# Allegro board 2019-09-10-2.brd
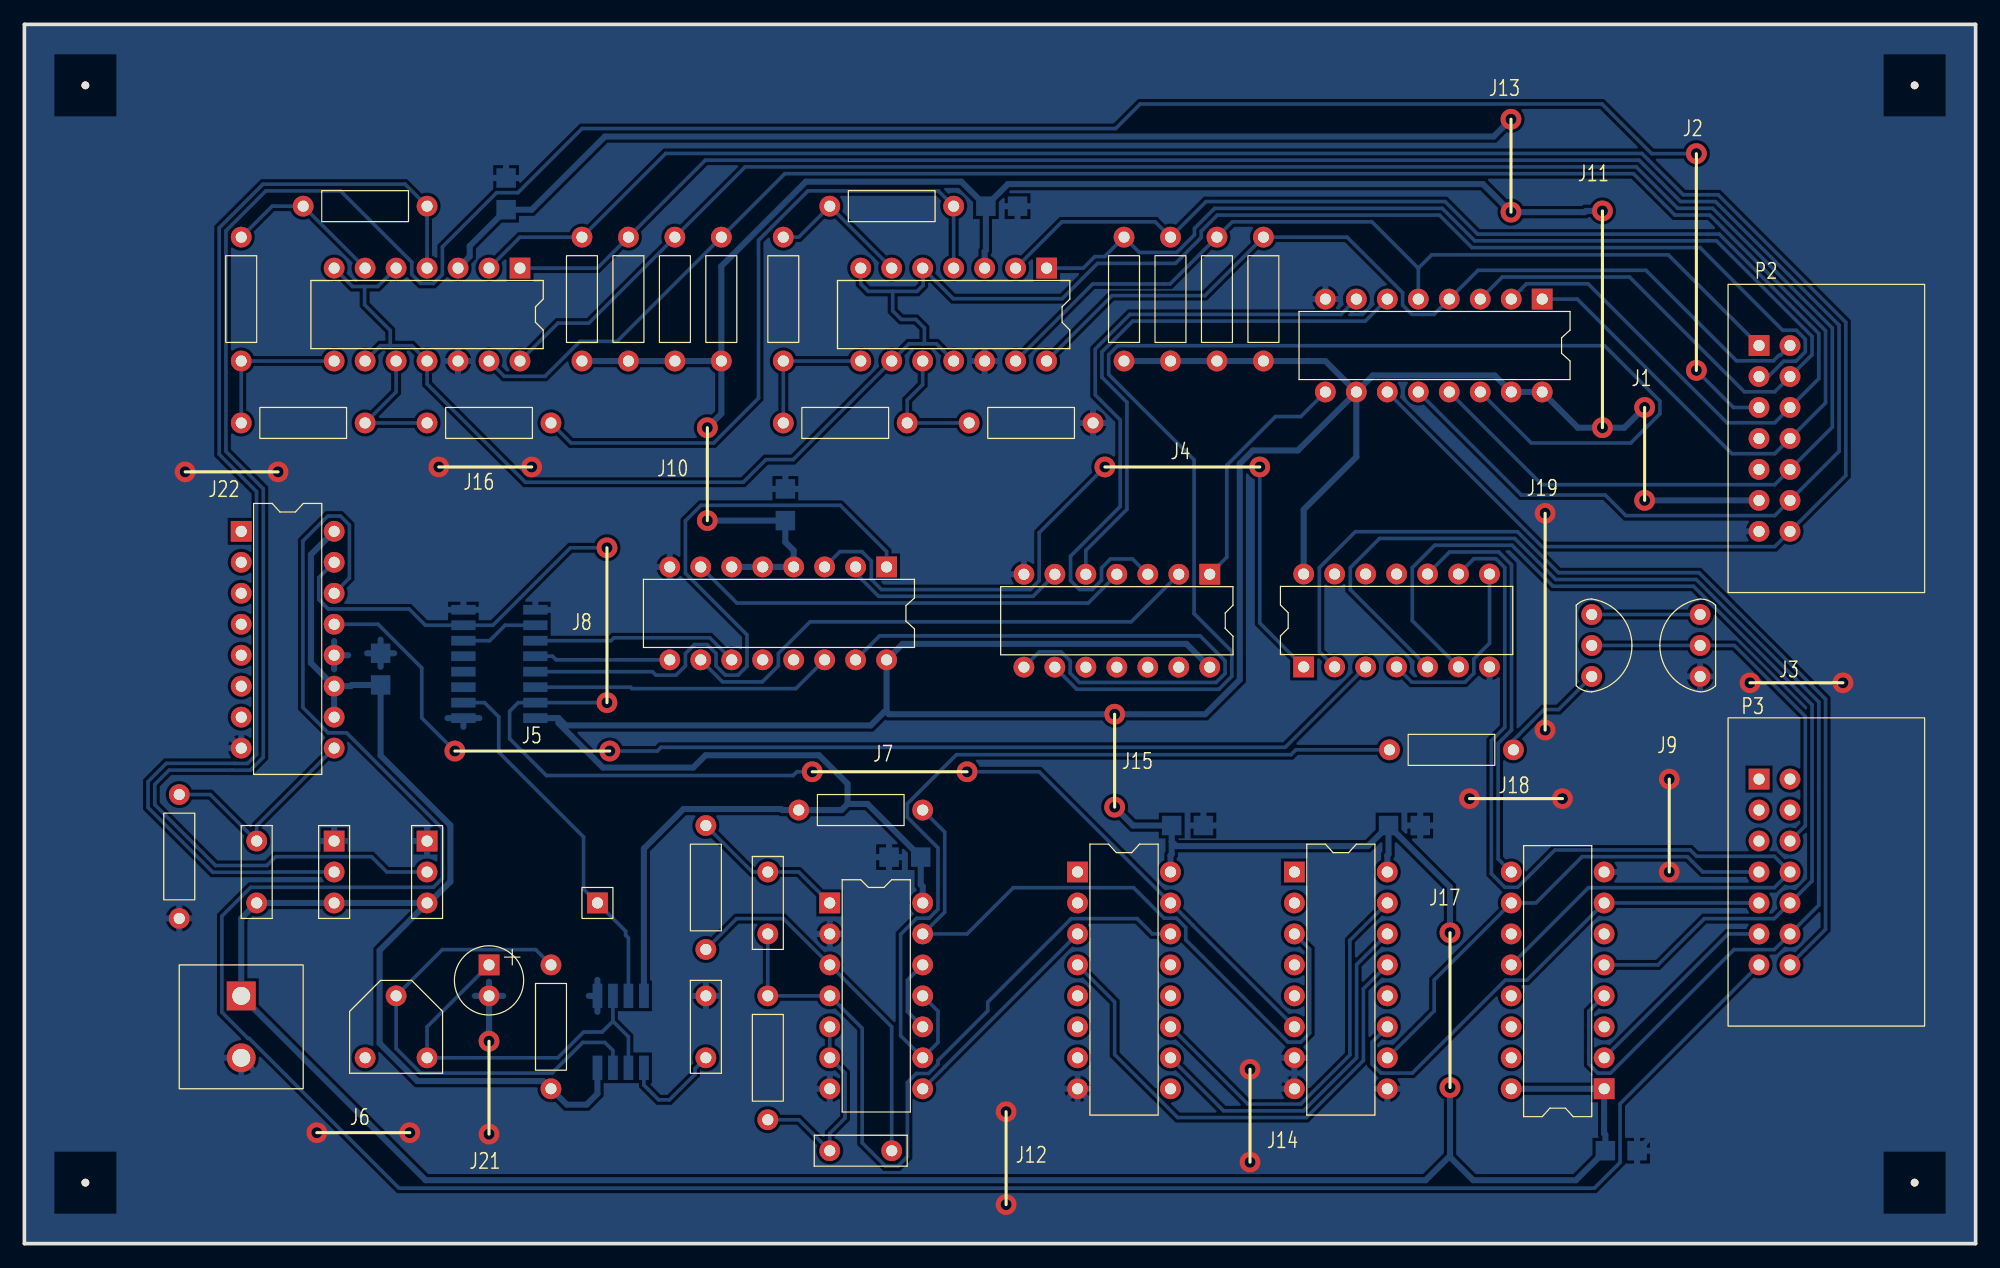
[diagram p0: board, top side]
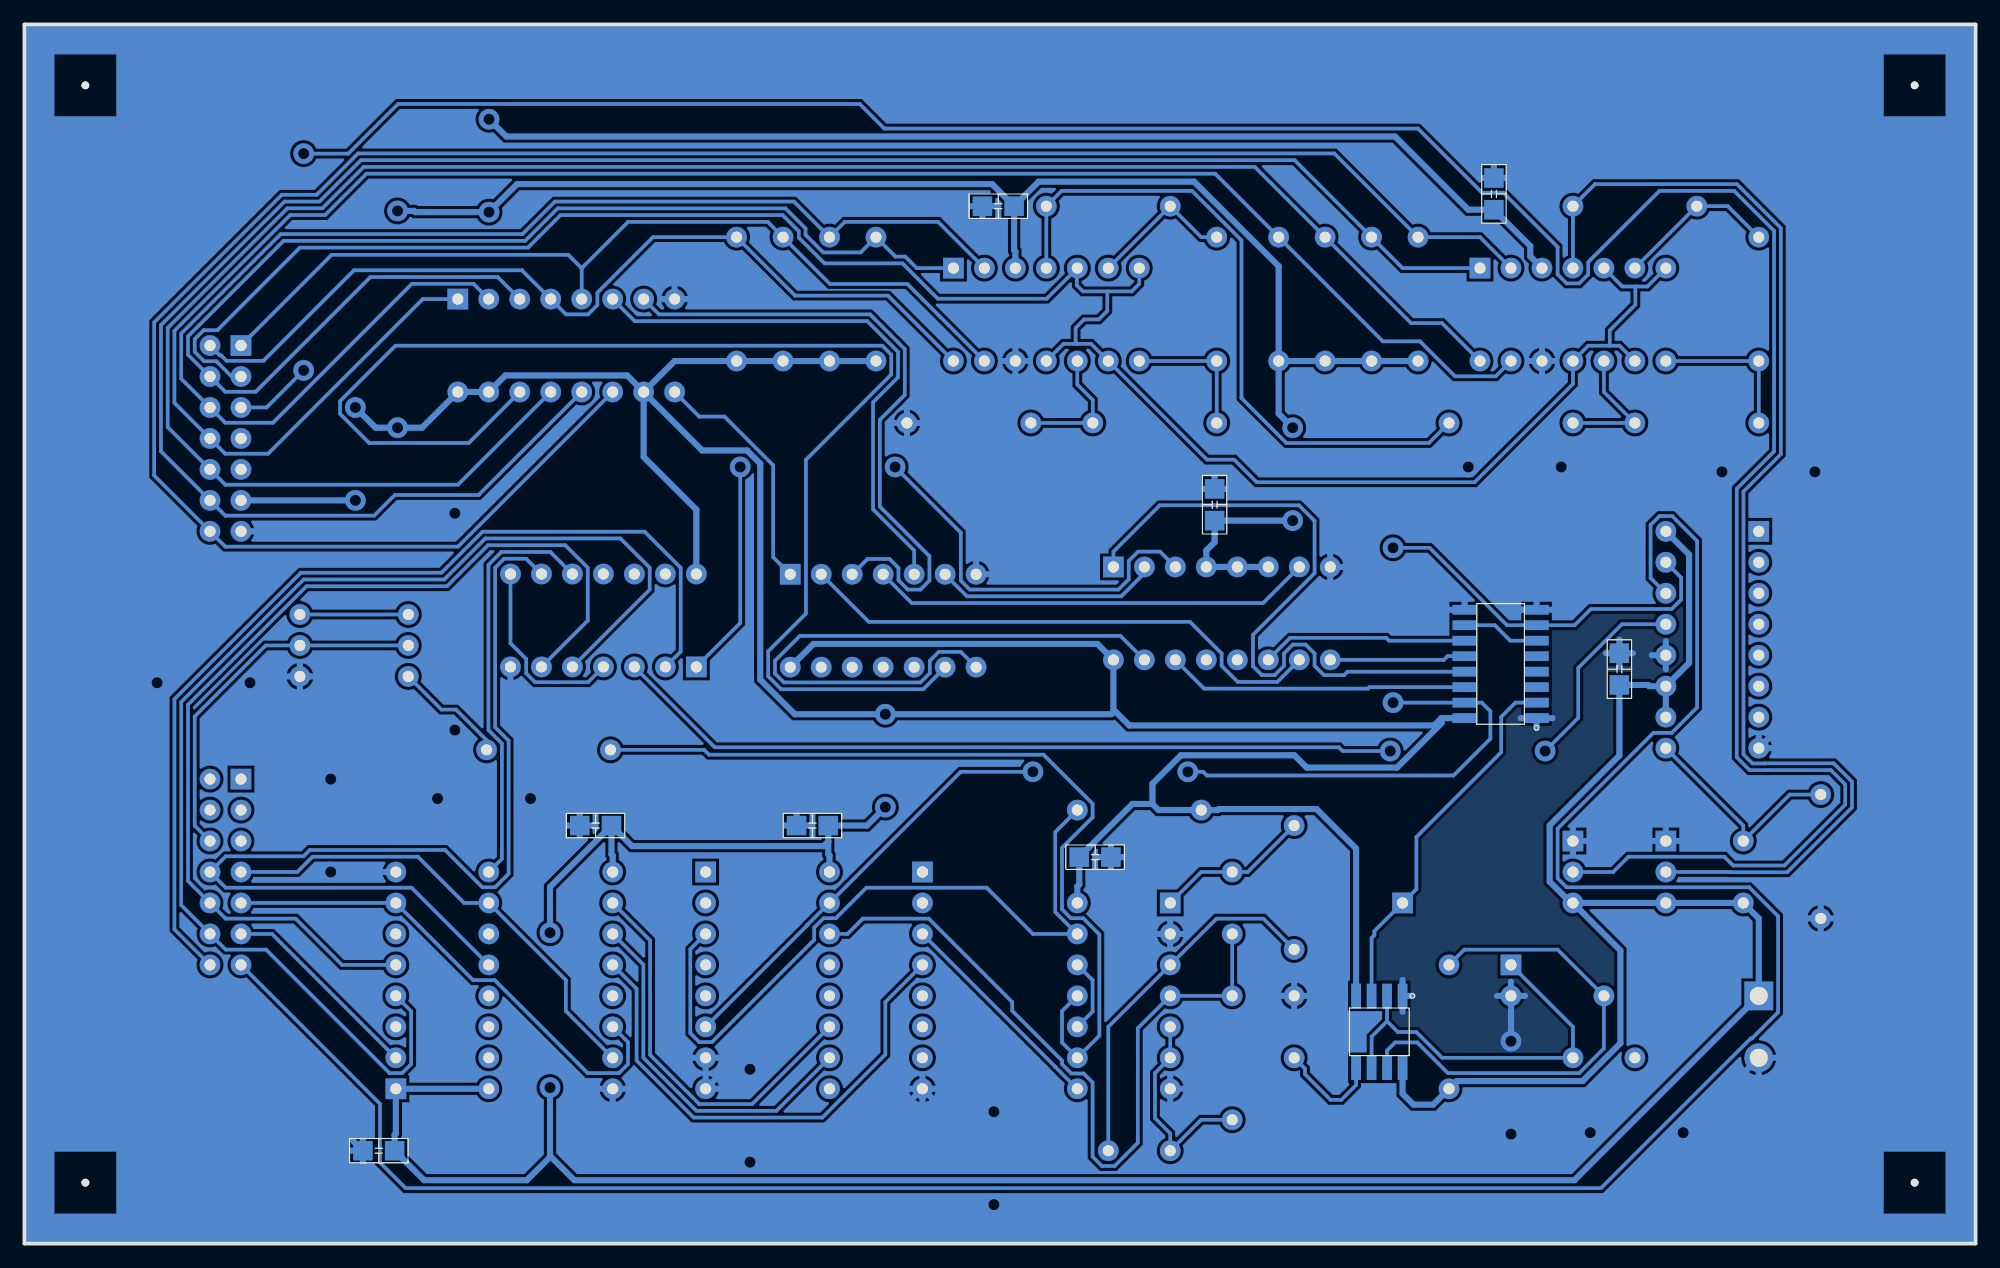
[diagram p1: board, bottom side, seen from below]

Outline 160 x 100 mm; copper layers: TOP, BOTTOM. Coordinates in mm from the lower left corner of the outline.
Outline path: 0,100 0,0 160,0 160,100 0,100

## Design rules (mm)
nets with their own width: min track width 0.5; nets +5V GND

## Placement (name value [footprint] x y rotation side)
C1  10uF  [CAP196]  38.1 22.86 0 top
C2  0.1uF  [CAP300]  55.88 15.24 90 top
C3  0.1uF  [CAP300]  19.05 27.94 90 top
C4  0.01uF  [CAP300]  60.96 30.48 270 top
C5  0.01uF  [CAP300]  71.12 7.62 180 top
C6  0.1uF  [SMDCAP]  39.5 84.7 90 bottom
C7  0.1uF  [SMDCAP]  78.74 85.09 0 bottom
C8  0.1uF  [SMDCAP]  62.4 59.2 90 bottom
C9  0.1uF  [SMDCAP]  111.76 34.29 0 bottom
C10  0.1uF  [SMDCAP]  93.98 34.29 0 bottom
C11  0.1uF  [SMDCAP]  29.21 45.72 90 bottom
C12  0.1uF  [SMDCAP]  129.54 7.62 0 bottom
C13  0.1uF  [SMDCAP]  73.6 31.7 180 bottom
J1  -  [JUMPER2]  132.86 60.96 270 bottom
J2  -  [JUMPER6]  137.1 89.4 90 bottom
J3  -  [JUMPER2]  141.5 46 180 bottom
J4  -  [JUMPER4]  88.6 63.7 180 bottom
J5  -  [JUMPER4]  48 40.4 0 bottom
J6  -  [JUMPER2]  31.6 9.1 0 bottom
J7  -  [JUMPER4]  77.3 38.7 0 bottom
J8  -  [JUMPER4]  47.77 44.37 270 bottom
J9  -  [JUMPER2]  134.88 30.48 270 bottom
J10  -  [JUMPER2]  56 59.3 270 bottom
J11  -  [JUMPER6]  129.4 84.7 90 bottom
J12  -  [JUMPER2]  80.5 3.2 270 bottom
J13  -  [JUMPER2]  121.9 84.6 270 bottom
J14  -  [JUMPER2]  100.5 14.3 90 bottom
J15  -  [JUMPER2]  89.4 35.8 270 bottom
J16  -  [JUMPER2]  41.6 63.7 0 bottom
J17  -  [JUMPER4]  116.9 25.5 90 bottom
J18  -  [JUMPER2]  118.5 36.5 180 bottom
J19  -  [JUMPER6]  124.7 59.9 90 bottom
J21  -  [JUMPER2]  38.1 16.6 90 bottom
J22  -  [JUMPER2]  20.8 63.3 0 bottom
NOREF  -  [unnamed]  5 5 0 top
NOREF#2  -  [#2]  0 0 90 top
NOREF#3  -  [unnamed]  5 95 0 top
NOREF#4  -  [#2]  0 0 0 top
NOREF#5  -  [unnamed]  155 95 0 top
NOREF#6  -  [unnamed]  155 5 0 top
P1  CON2  [POWER2]  17.78 20.32 270 top
P2  CON14  [JUMPER14]  142.24 73.66 270 top
P3  CON14  [JUMPER14]  142.24 38.1 270 top
Q1  2SC1815  [TO92]  128.52 51.6 270 top
Q2  2SC1815  [TO92]  137.41 46.52 90 top
R1  10K  [RES400]  43.18 12.7 0 top
R2  10K  [RES400]  33.02 85.09 90 top
R3  10K  [RES400]  17.78 82.55 180 top
R4  10K  [RES400]  17.78 67.31 270 top
R5  10K  [RES400]  33.02 67.31 270 top
R6  10K  [RES400]  76.2 85.09 90 top
R7  10K  [RES400]  62.23 82.55 180 top
R8  10K  [RES400]  62.23 67.31 270 top
R9  100  [RES400]  77.47 67.31 270 top
R10  4.7K  [RES400]  45.72 72.39 0 top
R11  4.7K  [RES400]  49.53 72.39 0 top
R12  4.7K  [RES400]  53.34 72.39 0 top
R13  4.7K  [RES400]  57.15 72.39 0 top
R14  4.7K  [RES400]  93.98 72.39 0 top
R15  4.7K  [RES400]  90.17 72.39 0 top
R16  4.7K  [RES400]  101.6 72.39 0 top
R17  4.7K  [RES400]  97.79 72.39 0 top
R18  680K  [RES400]  12.7 36.83 180 top
R19  10K  [RES400]  55.88 34.29 180 top
R20  10K  [RES400]  60.96 20.32 180 top
R21  10K  [RES400]  63.5 35.56 270 top
R22  1K  [RES400]  122.1 40.5 90 top
TP1  TP  [JUMPER1]  46.99 27.94 0 top
U1  NE555  [SOP8]  46.99 20.32 270 bottom
U2  LM339  [DIP14_3]  40.64 80.01 270 top
U3  LM339  [DIP14_3]  83.82 80.01 270 top
U4  40147  [DIP16_3]  124.46 77.47 270 top
U5  4069  [DIP14_3]  97.2 54.9 270 top
U6  4518  [SOP16]  36 43.1 0 bottom
U7  4585  [DIP16_3]  70.7 55.5 270 top
U8  4027  [DIP16_3]  17.78 58.42 0 top
U9  4071  [DIP14_3]  104.9 47.3 90 top
U10  4001  [DIP14_3]  66.04 27.94 0 top
U11  4017  [DIP16_3]  86.36 30.48 0 top
U12  4051  [DIP16_3]  104.14 30.48 0 top
U13  4175  [DIP16_3]  129.54 12.7 180 top
VR1  1M  [RESADJ]  33.02 15.24 270 top
VR2  10K  [JUMPER3]  25.4 33.02 270 top
VR3  10K  [JUMPER3]  33.02 33.02 270 top

## Library data of the parts
C1 = Cap Pol
C2-C5 = Cap NP: Tolerance: ***; User Part Number: ***
C6-C13 = Cap TEXT
J1-J19 J21 J22 = JUMPER
P1 = CON2
P2 P3 = CON14: User Part Number: ***
Q1 Q2 = 2SC1815
R1-R22 = resistor: Tolerance: ***; User Part Number: ***
TP1 = TP: User Part Number: ***
U1 = NE555
U2 U3 = LM339: Tolerance: ***; User Part Number: ***
U4 = 40147: Tolerance: ***; User Part Number: ***
U5 = 4069: Tolerance: ***; User Part Number: ***
U6 = 4518
U7 = 4585: Tolerance: ***; User Part Number: ***
U8 = 4027: Tolerance: ***; User Part Number: ***
U9 = 4071: Tolerance: ***; User Part Number: ***
U10 = 4001: Tolerance: ***; User Part Number: ***
U11 = 4017: Tolerance: ***; User Part Number: ***
U12 = 4051: Tolerance: ***; User Part Number: ***
U13 = 4175: Tolerance: ***; User Part Number: ***
VR1 = VR1: Tolerance: ***; User Part Number: ***
VR2 VR3 = VR2: User Part Number: ***

## Footprints (pads in the part's own frame, mm; a bottom-side part is the same pattern mirrored in y, then rotated)
CAP196
  rect 1.7x1.7 hole 0.914: 1(0,0)
  round 1.7 hole 0.91: 2(0,-2.54)
CAP300
  round 1.7 hole 0.91: 1(0,0) 2(5.08,0)
DIP14_3
  rect 1.7x1.7 hole 0.914: 1(0,0)
  round 1.7 hole 0.91: 2(0,-2.54) 3(0,-5.08) 4(0,-7.62) 5(0,-10.16) 6(0,-12.7) 7(0,-15.24) 8(7.62,-15.24) 9(7.62,-12.7) 10(7.62,-10.16) 11(7.62,-7.62) 12(7.62,-5.08) 13(7.62,-2.54) 14(7.62,0)
DIP16_3
  rect 1.7x1.7 hole 0.914: 1(0,0)
  round 1.7 hole 0.91: 2(0,-2.54) 3(0,-5.08) 4(0,-7.62) 5(0,-10.16) 6(0,-12.7) 7(0,-15.24) 8(0,-17.78) 9(7.62,-17.78) 10(7.62,-15.24) 11(7.62,-12.7) 12(7.62,-10.16) 13(7.62,-7.62) 14(7.62,-5.08) 15(7.62,-2.54) 16(7.62,0)
JUMPER1
  rect 1.7x1.7 hole 0.914: 1(0,0)
JUMPER3
  rect 1.7x1.7 hole 0.914: 1(0,0)
  round 1.7 hole 0.91: 2(2.54,0) 3(5.08,0)
JUMPER14
  rect 1.7x1.7 hole 0.914: 1(0,0)
  round 1.7 hole 0.91: 2(0,2.54) 3(2.54,0) 4(2.54,2.54) 5(5.08,0) 6(5.08,2.54) 7(7.62,0) 8(7.62,2.54) 9(10.16,0) 10(10.16,2.54) 11(12.7,0) 12(12.7,2.54) 13(15.24,0) 14(15.24,2.54)
POWER2
  rect 2.362x2.362 hole 1.473: 1(0,0)
  round 2.362 hole 1.473: 2(5.08,0)
RES400
  round 1.7 hole 0.91: 1(0,0) 2(0,10.16)
RESADJ
  round 1.7 hole 0.91: 1(0,0) 2(-5.08,-2.54) 3(0,-5.08)
SMDCAP
  rect 1.6x1.6 smd: 1(0.1,0) 2(2.7,0)
SOP8
  rect 2x0.8 smd: 1(0,0) 2(0,-1.27) 3(0,-2.54) 4(0,-3.81) 5(5.9,-3.81) 6(5.9,-2.54) 7(5.9,-1.27) 8(5.9,0)
SOP16
  rect 2x0.8 smd: 1(0,0) 2(0,-1.27) 3(0,-2.54) 4(0,-3.81) 5(0,-5.08) 6(0,-6.35) 7(0,-7.62) 8(0,-8.89) 9(5.9,-8.89) 10(5.9,-7.62) 11(5.9,-6.35) 12(5.9,-5.08) 13(5.9,-3.81) 14(5.9,-2.54) 15(5.9,-1.27) 16(5.9,0)
TO92
  round 1.7 hole 0.91: 1(0,0) 2(2.54,0) 3(5.08,0)
unnamed
  round 0.635 hole 3.175 unplated: (0,0)

## Nets
+5V: C3.1 C6.1 C7.1 C8.1 C9.1 C10.1 C11.1 C12.1 C13.1 P1.1 P2.11 R1.1 R10.1 R11.1 R12.1 R13.1 R14.1 R15.1 R16.1 R17.1 R21.1 U1.4(RST) U1.8(VCC) U2.3 U3.3 U4.10(I\9\) U4.15(I\0\) U4.16(VCC) U5.14 U6.16 U7.4(A>BIN) U7.5(A<BIN) U7.6(A=BIN) U7.16(VCC) U8.10(J) U8.11(K) U8.16 U9.14 U10.14 U11.16(VCC) U12.16(VCC) U13.1(R\S\T\) U13.16(VCC) VR2.3(A) VR3.3(A)
GND: C1.2 C2.2 C6.2 C7.2 C8.2 C9.2 C10.2 C11.2 C12.2 C13.2 P1.2 P2.13 Q2.1(B) R9.2 R18.2 U1.1(GND) U2.12 U3.12 U4.8(GND) U5.7 U6.1(CLK) U6.8 U6.9(CLK) U7.8(GND) U8.8 U8.12(RST) U9.7 U10.2(I1) U10.7 U11.8(GND) U12.7(VEE) U12.8(GND) U12.9(C) U13.8(GND) VR2.1(WIPER) VR3.1(WIPER)
AD0: P2.14 R10.2 U2.2(OUT) U4.11(I\1\)
AD1: P2.12 R11.2 U2.1(OUT) U4.12(I\2\)
AD2: P2.10 R12.2 U2.14(OUT) U4.13(I\3\)
AD3: P2.8 R13.2 U2.13(OUT) U4.1(I\4\)
AD4: P2.6 R14.2 U3.2(OUT) U4.2(I\5\)
AD5: P2.4 R15.2 U3.1(OUT) U4.3(I\6\)
AD6: P2.2 R16.2 U3.14(OUT) U4.4(I\7\)
AD7: P2.1 R17.2 U3.13(OUT) U4.5(I\8\)
CLK: TP1.1 U1.3(OUT) U6.2(EN)
MOTOR-GND: P3.6 Q1.2(C) Q2.2(C)
MR: U6.7(CLR) U6.15(CLR) U8.15(Q) U11.15(RST) U12.6(E\N\)
MR2: P3.13 U8.14(Q\)
SW1: P3.14 U9.2(I1)
SW2: P3.12 U9.5(I0) U13.4(D0)
SW3: P3.10 U9.6(I1) U13.5(D1)
SW4: P3.8 U9.9(I1) U13.12(D2)
SWLED1: P3.11 U13.2(Q0)
SWLED2: P3.9 U12.11(A) U13.7(Q1)
SWLED3: P3.7 U12.10(B) U13.10(Q2)
VR3: P2.5 VR3.2(B)
VR-LED: P2.3 U2.5(+IN) U2.7(+IN) U2.9(+IN) U2.11(+IN) U3.5(+IN) U3.7(+IN) U3.9(+IN) U3.11(+IN)
N01960: R2.2 R3.1 U2.6(-IN)
N01964: R2.1 U2.4(-IN) VR2.2(B)
N02001: R3.2 R4.1 U2.8(-IN)
N02088: R4.2 R5.1 U2.10(-IN)
N02162: R5.2 R6.1 U3.4(-IN)
N02236: R6.2 R7.1 U3.6(-IN)
N02310: R7.2 R8.1 U3.8(-IN)
N02384: R8.2 R9.1 U3.10(-IN)
N03342: U4.9(A\) U5.1(I)
N03346: U4.7(B\) U5.3(I)
N03353: U4.6(C\) U5.5(I)
N03365: U4.14(D\) U5.9(I)
N03377: U5.8(O) U7.15(A3)
N03391: U5.6(O) U7.2(A2)
N03403: U5.4(O) U7.7(A1)
N03415: U5.2(O) U7.10(A0)
N03439: U6.11(Q0) U7.11(B0)
N03441: U6.12(Q1) U7.9(B1)
N03443: U6.13(Q2) U7.1(B2)
N03445: U6.14(Q3) U7.14(B3)
N03459: U6.6(Q3) U6.10(EN)
N03623: R1.2 U1.7(DISC) VR1.2
N03677: C1.1 U1.2(TRIG) U1.6(THR) VR1.1
N03742: C2.1 U1.5(CV)
N03797: U7.3(A=BOUT) U9.1(I0)
N03822: U8.13(CLK) U9.3(O)
N03853: C3.2 R18.1 U8.9(SET)
N08438: C4.1 R19.1 U10.1(I0)
N08457: C4.2 R20.1 U10.4(O) U11.14(CLK)
N08473: C5.2 R20.2 U10.5(I0) U10.6(I1)
N08528: C5.1 R19.2 U10.3(O)
N08724: U11.11(9) U12.15(X2)
N08757: U11.10(4) U12.14(X1)
N08772: U11.4(2) U12.13(X0)
N08784: U10.8(I0) U11.3(0)
N08808: R21.2 U10.13(I1) U12.3(X)
N08837: U9.4(O) U9.8(I0)
N08841: U9.10(O) U13.9(CLK)
N09092: U10.10(O) U10.12(I0)
N09117: R22.2 U10.9(I1) U10.11(O)
N09203: Q1.3(E) R22.1
N09219: Q1.1(B) Q2.3(E)

Pads without a net: P2 7 9; P3 1 2 3 4 5; U5 10 11 12 13; U6 3 4 5; U7 12 13; U8 1 2 3 4 5 6 7; U9 11 12 13; U11 1 2 5 6 7 9 12 13; U12 1 2 4 5 12; U13 3 6 11 13 14 15; VR1 3

## Via types
v1: diameter 1.7, hole 0.91, TOP to BOTTOM, 42 vias

## Routing (per net, layer and track width the routed paths; a pad name or vN(x,y) marks a point on that pad's centre or on a via; arc(x,y) is an arc through that point)
+5V: length 761.7
  BOTTOM w0.5: R13.1 57.15,68.07 v1(56,66.92) ; R13.1 57.15,80.17 64.08,87.1 76.83,87.1 C7.1 ; R13.1 R12.1 R11.1 R10.1 ; VR3.3 29.13,24.05 29.13,16.43 32.23,13.33 42.55,13.33 R1.1 44.48,11.4 46.1,11.4 46.99,12.29 U1.8 ; VR3.3 VR2.3 C3.1 17.78,26.67 P1.1 32.9,5.2 114.9,5.2 116.9,7.2 ; VR3.3 33.18,27.94 34.93,29.69 34.93,34.31 29.21,40.03 C11.1 26.85,45.82 26.75,45.72 U8.11 ; 116.9,7.2 116.9,7.1 118.8,5.2 127.22,5.2 C12.1 129.64,8.92 129.54,9.02 U13.1 U13.16 ; 116.9,7.2 v1(116.9,12.8) ; 70.7,43.6 70.88,43.42 v1(89.4,43.42) 96.82,43.42 99.66,46.26 99.66,63.98 100.74,65.05 104.42,65.05 U4.10 ; 70.7,43.6 70.5,43.6 69.4,42.5 44.4,42.5 43.8,43.1 ; 70.7,43.6 U7.16 72.01,49.19 95.29,49.19 U5.14 ; U4.10 109.22,64.52 104.9,60.2 U9.14 ; U4.10 106.68,72.39 R16.1 R17.1 R14.1 R15.1 ; U4.10 110.57,71.2 120.57,71.2 U4.15 U4.16 127.39,66.92 v1(129.4,66.92) 131.2,66.92 v1(132.86,68.58) ; U2.3 36.52,80.97 36.52,81.82 C6.1 41.6,84.8 47.6,90.8 120.48,90.8 v1(121.9,92.22) ; 94.08,32.99 94.47,32.6 110.17,32.6 C9.1 ; 94.08,32.99 94.08,31.93 93.98,31.83 U11.16 ; 94.08,32.99 C10.1 90.91,34.29 v1(89.4,35.8) ; U8.11 U8.10 ; U8.11 23.49,47.63 23.49,56.51 U8.16 ; v1(116.9,25.5) 116.9,29.25 C9.1 ; 43.8,43.1 43.8,42.69 47.44,39.05 54.85,39.05 55.85,40.05 65.16,40.05 67.5,37.72 67.5,36.06 ; 43.8,43.1 U6.16 ; 67.5,36.06 69.14,36.06 C13.1 73.5,29.45 73.66,29.29 U10.14 ; 67.5,36.06 67,35.56 R21.1 62.15,35.56 62.06,35.64 54.04,35.64 50.8,32.4 U1.4 ; C7.1 78.84,81.46 78.74,81.36 U3.3 ; C7.1 80.65,86.9 119.6,86.9 v1(121.9,84.6) 127.95,84.6 128.05,84.7 v1(129.4,84.7) ; C9.1 111.86,31.93 111.76,31.83 U12.16 ; v1(56,59.3) C8.1 62.4,57.53 63.08,56.85 U7.4 U7.5 U7.6 ; P2.11 v1(132.86,60.96)
GND: length 378.6
  BOTTOM w0.5: 28.1,48.42 C11.2 ; C11.2 29.21,49.53 ; C11.2 30.32,48.42 ; C11.2 29.21,47.31 ; C8.2 63.51,61.9 ; C8.2 61.29,61.9 ; C8.2 62.4,63.01 ; Q2.1 137.41,47.68 ; Q2.1 136.25,46.52 ; Q2.1 138.76,46.52 139.28,46 v1(141.5,46) ; Q2.1 137.41,40.63 v1(134.88,38.1) 133.53,38.1 133.33,37.9 130.8,37.9 129.4,36.5 v1(126.12,36.5) 126.12,40.7 v1(124.7,42.12) ; 86.47,67.31 R9.2 ; R9.2 88.79,67.31 ; R9.2 87.63,66.15 ; R9.2 87.63,68.47 ; 102.98,15.24 U12.7 ; U12.7 104.14,14.08 ; U12.7 105.3,15.24 ; v1(20.8,63.3) 26.3,63.3 32.1,57.5 32.1,53.3 33.41,51.99 U6.8 ; P1.2 18.97,14.05 19.03,14.05 v1(23.98,9.1) 29.88,3.2 v1(80.5,3.2) ; P1.2 16.29,15.24 ; P1.2 17.78,13.75 ; 41.9,52.7 U6.9 43.21,51.99 ; v1(100.5,6.68) 92.38,6.68 U11.8 ; U12.9 112.92,12.7 ; U12.9 111.76,11.54 ; U12.9 110.6,12.7 ; 46.28,20.32 U1.1 ; U1.1 46.99,21.63 ; U1.1 46.99,19.01 ; C1.2 39.26,20.32 ; C1.2 38.1,21.48 ; C1.2 v1(38.1,16.6) ; C1.2 36.94,20.32 ; C12.2 133.35,7.62 ; C12.2 149.12,24.5 v1(149.12,46) ; C12.2 132.24,6.51 ; C12.2 132.24,8.73 ; C2.2 57.04,20.32 ; C2.2 55.88,19.16 ; C2.2 54.72,20.32 ; C2.2 55.88,21.48 ; v1(134.88,30.48) U13.8 ; 12.7,25.51 R18.2 ; R18.2 11.54,26.67 ; R18.2 12.7,27.83 ; R18.2 13.86,26.67 ; VR3.1 33.02,34.18 ; VR3.1 31.86,33.02 ; VR3.1 33.02,31.86 ; P2.13 126.18,58.42 v1(124.7,59.9) ; 77.58,72.39 U3.12 ; U3.12 79.9,72.39 ; U3.12 78.74,73.55 ; U3.12 78.74,71.23 ; 66.04,11.54 U10.7 ; U10.7 64.88,12.7 ; U10.7 66.04,13.86 ; 36,42.39 U6.1 ; U6.1 34.69,43.1 ; U6.1 37.31,43.1 ; U9.7 120.14,44.54 118.5,42.9 v1(118.5,36.5) ; U2.12 36.72,72.39 ; U2.12 35.56,73.55 ; U2.12 34.4,72.39 ; U2.12 35.56,71.23 ; U10.2 66.04,26.56 ; U10.2 66.04,24.24 ; U10.2 67.2,25.4 ; U10.2 64.88,25.4 ; 85.2,12.7 U11.8 ; U11.8 86.36,13.86 ; U11.8 84.48,10.82 v1(80.5,10.82) ; U11.8 87.52,12.7 ; U11.8 86.36,11.54 ; 113.35,34.29 C9.2 ; C9.2 115.57,34.29 ; C9.2 114.46,35.4 ; C9.2 114.46,33.18 ; 52.92,54.34 U7.8 ; U7.8 51.76,55.5 ; U7.8 52.92,56.66 ; U8.12 25.4,49.42 ; U8.12 26.56,48.26 ; U8.12 25.4,47.1 ; 81.44,83.98 C7.2 ; C7.2 80.33,85.09 ; C7.2 82.55,85.09 ; C13.2 70.9,32.81 ; C13.2 69.79,31.7 ; C13.2 72.01,31.7 ; C13.2 70.9,30.59 ; C6.2 40.61,87.4 ; C6.2 38.39,87.4 ; C6.2 39.5,88.51 ; 102.98,12.7 U12.8 ; U12.8 102.54,14.3 v1(100.5,14.3) ; U12.8 104.14,13.86 ; U6.8 36,52.7 ; U6.8 37.31,51.99 ; 81.96,56.06 U5.7 80.8,54.9 ; v1(31.6,9.1) 32.95,9.1 33.07,8.98 v1(38.1,8.98) ; VR2.1 26.56,33.02 ; VR2.1 24.24,33.02 ; VR2.1 25.4,34.18 ; 95.57,34.29 C10.2 ; C10.2 97.79,34.29 ; C10.2 96.68,35.4 ; U4.8 107.84,77.47 ; U4.8 106.68,78.63 ; U4.8 105.52,77.47 ; v1(13.18,63.3) 13.18,45.24 U8.8 ; U8.8 17.78,41.8 ; U8.8 16.62,40.64
  vias: v1(33.98,63.7) v1(41.6,63.7)
AD0: length 178.7
  BOTTOM w0.3: U4.11 124.44,57.17 143.53,57.17 P2.14 149.36,63 149.36,75.56 138.89,86.02 136.03,86.02 132.64,89.42 52.59,89.42 R10.2 40.64,82.55 U2.2
AD1: length 168.7
  BOTTOM w0.3: U4.12 122.75,61.4 129.63,61.4 131.32,59.71 143.53,59.71 P2.12 148.8,64.98 148.8,75.33 138.66,85.47 135.8,85.47 132.41,88.86 55.84,88.86 R11.2 46.99,80.01 U2.1
AD2: length 164.3
  BOTTOM w0.3: U2.14 43.75,75.5 46.29,75.5 R12.2 59.1,88.31 132.18,88.31 135.57,84.92 138.43,84.92 148.25,75.1 148.25,66.97 P2.10 143.53,62.25 124.44,62.25 U4.13
AD3: length 158.5
  BOTTOM w0.3: U2.13 39.35,71.14 42.69,71.14 45.56,74 48.6,74 R13.2 62.35,87.75 131.95,87.75 135.34,84.36 138.21,84.36 147.7,74.87 147.7,68.96 P2.8 143.53,64.79 140.01,64.79 127.33,77.47 U4.1
AD4: length 109.3
  BOTTOM w0.3: U4.2 123.17,78.72 128.22,78.72 139.62,67.33 143.53,67.33 P2.6 147.14,70.94 147.14,74.64 138.98,82.8 119.16,82.8 116.5,85.47 96.9,85.47 R14.2 92.73,83.8 85.07,83.8 U3.2
AD5: length 105.1
  BOTTOM w0.3: U4.3 121.19,79.28 131.62,79.28 141.03,69.87 143.53,69.87 P2.4 144.8,71.12 146.59,72.91 146.59,74.41 138.75,82.25 118.93,82.25 116.27,84.91 97.59,84.91 95.94,83.26 95.94,82.74 94.5,81.3 91.42,81.3 R15.2 88.57,80.95 87.77,80.95 86.83,80.01 U3.1
AD6: length 73.5
  BOTTOM w0.3: U3.14 89.18,77.75 96.8,77.75 R16.2 108.45,82.55 113.01,77.99 113.01,76.98 113.78,76.22 115.59,76.22 U4.4 119.2,79.83 132.97,79.83 140.39,72.41 143.42,72.41 143.87,72.86 143.97,72.86 P2.2
AD7: length 73.4
  BOTTOM w0.3: U3.13 87.6,78.71 93.95,78.71 R17.2 99.04,83.8 110.5,83.8 114.24,80.06 ; 114.24,80.06 114.36,80.06 115.4,81.1 134.8,81.1 P2.1 ; 114.24,80.06 114.3,80 U4.5
CLK: length 30.7
  BOTTOM w0.3: U6.2 37.73,44.37 38.9,43.2 38.9,40.3 45.85,33.35 45.85,29.08 TP1.1 49.3,25.63 49.3,25.3 49.53,25.07 U1.3
MOTOR-GND: length 30.7
  BOTTOM w0.3: Q1.2 Q2.2 140.21,49.06 146.03,43.24 146.03,34.27 P3.6
MR: length 102.9
  BOTTOM w0.3: U12.6 95.79,26.13 95.79,26.15 94,27.94 U11.15 83.22,38.7 v1(77.3,38.7) ; U8.15 24.15,54.63 24.15,52.82 24.91,52.05 31.55,52.05 32.88,50.72 U6.7 38.42,50.72 44.77,57.07 v1(47.77,57.07) ; v1(64.6,38.7) 63.35,38.7 63.04,38.39 42.81,38.39 39.79,41.41 39.79,43.66 40.5,44.37 U6.15 v1(47.77,44.37)
MR2: length 214.1
  BOTTOM w0.3: P3.13 130.84,11.46 130.84,6.65 128.74,4.55 30.72,4.55 18.44,16.82 18.34,16.82 16.2,18.97 16.2,26.86 18.56,29.23 33.54,29.23 34.27,29.96 34.27,34.04 26.42,41.89 24.91,41.89 22.84,43.97 22.84,57.63 24.88,59.67 25.92,59.67 26.65,58.94 26.65,54.59 U8.14
SW1: length 80.1
  BOTTOM w0.3: P3.14 147.7,25.78 147.7,44.66 137.33,55.03 125.8,55.03 122.44,58.39 109.14,58.39 106.19,55.44 106.19,48.55 U9.2
SW2: length 103.4
  BOTTOM w0.3: U13.4 128.29,19.07 128.29,14.72 129.02,13.99 130.06,13.99 140.19,24.11 143.49,24.11 P3.12 147.14,27.76 147.14,44.43 137.1,54.47 125.57,54.47 122.21,57.84 111.12,57.84 108.73,55.44 108.73,53.63 U9.5
SW3: length 83
  BOTTOM w0.3: U9.6 113.81,51.09 113.81,55.44 115.65,57.28 121.98,57.28 125.34,53.92 136.87,53.92 146.59,44.2 146.59,29.75 P3.10 143.49,26.65 137.75,26.65 133.96,22.86 U13.5
SW4: length 83.2
  BOTTOM w0.3: U13.12 128.25,29.19 143.49,29.19 P3.8 143.49,31.77 137.12,31.77 136.6,32.29 125.5,32.29 122.44,29.23 121.4,29.23 120.29,30.33 120.29,41.25 121.39,42.35 121.39,55.44 120.66,56.17 118.85,56.17 U9.9
SWLED1: length 16.9
  BOTTOM w0.3: U13.2 139.7,25.4 P3.11
SWLED2: length 41.4
  BOTTOM w0.3: P3.9 U13.7 123.21,21.61 121.43,21.61 113.81,13.99 111.24,13.99 110.51,14.72 110.51,16.53 U12.11
SWLED3: length 39.3
  BOTTOM w0.3: P3.7 137.62,30.48 136.37,31.73 127.73,31.73 123.94,27.94 U13.10 115.6,21.62 115.6,19.08 U12.10
VR3: length 222.3
  BOTTOM w0.3: v1(137.1,89.4) 133.44,89.4 129.36,93.47 91.5,93.47 89.48,91.46 45.73,91.46 40.47,86.2 38.72,86.2 34.27,81.75 34.27,79.49 33.54,78.76 32.5,78.76 31.77,79.49 31.77,80.5 25.92,86.34 19.8,86.34 16.53,83.07 16.53,64.97 19.59,61.91 19.59,39.89 18.53,38.83 17.03,38.83 17.02,38.84 11.87,38.84 10.69,37.66 10.69,36 15.68,31.01 19.88,31.01 20.6,31.73 28.47,31.73 29.72,30.48 VR3.2 ; v1(137.1,71.62) 140.14,68.58 P2.5
VR-LED: length 172.7
  BOTTOM w0.3: 30,73.64 29.19,73.64 U2.9 ; 30,73.64 31.77,73.64 U2.11 33.02,70.51 41.08,62.45 58.95,62.45 60.8,64.3 63.03,64.3 U3.9 72.53,73.8 73.7,73.8 ; 30,73.64 30,74.9 27.9,77 27.9,78.5 ; 73.7,79.97 U3.5 ; 73.7,79.97 73.7,78.6 73.2,78.1 71.2,78.1 ; 73.7,79.97 76.17,77.5 85.1,77.5 88,80.4 94.39,80.4 96.5,82.51 96.5,83.03 97.82,84.36 116.04,84.36 118.7,81.69 137.4,81.69 144.18,74.91 145.3,74.91 146.03,74.18 146.03,73.14 145.27,72.37 144.26,72.37 143.01,71.12 P2.3 ; 71.2,78.1 71.2,76.5 71.9,75.8 73.1,75.8 73.8,75.1 73.8,73.9 73.7,73.8 ; 71.2,78.1 69.2,78.1 68.58,78.72 U3.7 ; U3.11 74.79,73.8 73.7,73.8 ; 27.9,78.5 26.91,78.5 U2.7 ; 27.9,78.5 28.97,78.5 U2.5
N01960: length 13.3
  BOTTOM w0.3: R3.1 20.32,85.09 R2.2 U2.6
N01964: length 98.2
  BOTTOM w0.3: U2.4 R2.1 31.21,86.9 19.57,86.9 15.97,83.3 15.97,64.74 19.03,61.68 19.03,40.12 18.3,39.39 17.26,39.39 17.25,39.39 11.64,39.39 10.14,37.89 10.14,35.77 15.45,30.46 20.11,30.46 20.13,30.48 VR2.2
N02001: length 12.7
  BOTTOM w0.3: U2.8 R3.2 R4.1
N02088: length 11.2
  BOTTOM w0.3: R5.1 R4.2 30.48,69.85 U2.10
N02162: length 55.5
  BOTTOM w0.3: U3.4 R6.1 74.95,86.34 64.25,86.34 60.2,82.29 60.2,69.35 56.52,65.67 44.82,65.67 R5.2
N02236: length 12
  BOTTOM w0.3: R7.1 63.5,82.55 R6.2 U3.6
N02310: length 11.4
  BOTTOM w0.3: R8.1 R7.2 U3.8
N02384: length 10.7
  BOTTOM w0.3: R9.1 R8.2 72.39,69.19 73.66,70.46 U3.10
N03342: length 20.1
  BOTTOM w0.3: U4.9 104.67,67.83 102.59,67.83 98.6,63.84 98.6,56.3 U5.1
N03346: length 53.4
  BOTTOM w0.3: U4.7 107.97,76.22 90.65,76.22 87.81,73.37 87.81,69.61 89.85,67.56 89.85,60.45 85.79,56.39 85.79,54.38 86.52,53.65 87.56,53.65 88.33,54.41 88.33,55.42 89.06,56.15 90.87,56.15 U5.3
N03353: length 45.7
  BOTTOM w0.3: U5.5 87.04,56.86 90.41,60.22 90.41,69.01 88.36,71.05 88.36,73.14 90.88,75.66 109.95,75.66 U4.6
N03365: length 112.1
  BOTTOM w0.3: U5.9 84.5,47.26 86.29,45.47 97.95,45.47 99.01,46.53 99.01,48.58 95.91,51.67 95.91,64.29 88.92,71.28 88.92,72.91 89.65,73.64 129.57,73.64 134.11,69.1 134.11,68.06 131.72,65.67 123.56,65.67 U4.14
N03377: length 51.9
  BOTTOM w0.3: U7.15 70.12,49.84 96.41,49.84 98.45,47.8 98.45,46.76 97.72,46.03 86.52,46.03 85.75,46.79 85.75,47.8 85.02,48.53 83.21,48.53 U5.8
N03391: length 18.4
  BOTTOM w0.3: U5.6 84.5,54.88 82.71,53.09 70.05,53.09 68.16,54.98 U7.2
N03403: length 36.3
  BOTTOM w0.3: U5.4 89.58,54.88 87.24,52.54 58.42,52.54 U7.7
N03415: length 44.2
  BOTTOM w0.3: U5.2 90.76,51 64.43,51 61.83,48.4 61.83,47.39 60.51,46.07 57.25,46.07 55.46,47.86 U7.10
N03439: length 17
  BOTTOM w0.3: U7.11 58,47.9 56.21,49.69 48.34,49.69 48.1,49.45 U6.11
N03441: length 11.1
  BOTTOM w0.3: U7.9 43.6,47.88 43.3,48.18 U6.12
N03443: length 54.9
  BOTTOM w0.3: U6.13 51.5,46.91 51.78,46.63 53.44,46.63 54.21,47.39 54.21,48.4 54.94,49.13 55.98,49.13 56.71,48.4 56.71,47.39 57.48,46.63 58.52,46.63 59.25,47.36 59.25,49.93 54.21,54.98 54.21,59.28 55.48,60.55 66.9,60.55 70.7,56.75 U7.1
N03445: length 24.7
  BOTTOM w0.3: U7.14 63.26,45.52 49.82,45.52 49.7,45.64 U6.14
N03459: length 6.4
  BOTTOM w0.3: U6.6 38.15,49.45 39.42,50.72 U6.10
N03623: length 40.5
  BOTTOM w0.3: U1.7 48.26,15.84 47.6,16.5 45.78,16.5 43.27,13.99 32.5,13.99 30.48,16.01 VR1.2 34.27,24.11 41.93,24.11 R1.2
N03677: length 32.6
  BOTTOM w0.3: 48.26,18.24 49.53,16.97 U1.6 ; 48.26,18.24 U1.2 ; 48.26,18.24 47.37,17.35 45.85,17.35 43.74,15.24 VR1.1 33.02,17.78 C1.1
N03742: length 8.7
  BOTTOM w0.3: C2.1 54.99,14.35 54.99,13.89 52.89,11.79 52.01,11.79 50.8,13 U1.5
N03797: length 50
  BOTTOM w0.3: v1(88.6,63.7) 83.21,58.31 83.21,54.38 82.48,53.65 70.28,53.65 69.45,54.48 69.45,55.99 68.68,56.75 66.87,56.75 U7.3 ; v1(101.3,63.7) 101.3,50.9 U9.1
N03822: length 81.4
  BOTTOM w0.3: U8.13 29,50.8 32.58,47.22 32.58,43.12 v1(35.3,40.4) ; v1(48,40.4) 51.9,40.4 52.21,40.71 103.39,40.71 U9.3
N03853: length 18.2
  BOTTOM w0.3: R18.1 15.24,36.83 C3.2 19.05,34.29 U8.9
N08438: length 12.8
  BOTTOM w0.3: U10.1 63.5,30.48 C4.1 59.69,30.48 R19.1
N08457: length 62.5
  BOTTOM w0.3: U11.14 92.5,25.4 91.25,26.65 85.84,26.65 79,19.81 79,19.1 74.91,15.01 74.91,14.72 74.15,13.95 73.14,13.95 72.41,13.22 72.41,7.13 71.64,6.37 70.6,6.37 68.7,8.27 68.7,17.66 U10.4 R20.1 C4.2
N08473: length 17.3
  BOTTOM w0.3: U10.5 U10.6 67.29,13.99 67.29,10.29 66.04,9.04 C5.2 63.5,10.16 R20.2
N08528: length 30.1
  BOTTOM w0.3: R19.2 58.4,26.65 62.25,26.65 U10.3 71.12,17.78 C5.1
N08724: length 32.7
  BOTTOM w0.3: U12.15 108.69,24.87 108.69,15.48 104.66,11.45 100.31,11.45 U11.11
N08757: length 30.1
  BOTTOM w0.3: U12.14 109.25,22.89 109.25,15.25 104.89,10.89 98.33,10.89 U11.10
N08772: length 41.7
  BOTTOM w0.3: U11.4 89.4,19.82 89.4,15.51 94.57,10.34 105.12,10.34 109.8,15.02 109.8,20.9 U12.13
N08784: length 18
  BOTTOM w0.3: U10.8 73.68,12.7 75.47,14.49 75.47,14.51 U11.3
N08808: length 59.8
  BOTTOM w0.3: 73.68,25.4 77.3,25.4 81.09,29.19 90.95,29.19 93.46,26.69 94.47,26.69 95.23,25.92 95.23,24.91 103.62,16.53 104.66,16.53 105.39,17.26 105.39,24.15 U12.3 ; 73.68,25.4 75.47,27.19 75.47,33.75 R21.2 ; 73.68,25.4 U10.13
N08837: length 15.8
  BOTTOM w0.3: U9.8 120.14,49.24 118.85,47.95 118.85,46.78 118.12,46.05 113.77,46.05 U9.4
N08841: length 34.2
  BOTTOM w0.3: U9.10 116.87,56.73 120.89,56.73 121.95,55.67 121.95,42.12 120.85,41.02 120.85,31.55 U13.9
N09092: length 6.1
  BOTTOM w0.3: U10.12 72.41,21.61 72.41,19.03 U10.10
N09117: length 72
  BOTTOM w0.3: U10.11 74.91,19.07 74.91,16.49 U10.9 71.85,17.05 71.85,25.37 73.17,26.69 74.18,26.69 74.91,27.42 74.91,32.46 72.41,34.97 72.41,36.08 76.43,40.1 103.86,40.1 104.26,40.5 R22.2
N09203: length 9.4
  BOTTOM w0.3: Q1.3 125.8,43.8 124.61,43.8 122.1,41.29 R22.1
N09219: length 8.9
  BOTTOM w0.3: Q2.3 Q1.1

## Copper pours and planes (outline as drawn; the poured copper is in the pictures)
GND on BOTTOM (solid shape): 137.45,30.07 141.21,30.07 141.29,29.91 141.39,29.77 141.41,29.66 141.32,29.6 130.46,29.6 130.37,29.66 130.39,29.77 130.65,30.46 130.41,31.16 130.4,31.27 130.49,31.33 136.2,31.33
GND on BOTTOM (solid shape): 113.35,70.7 113.44,70.64 113.43,70.53 113.41,69.19 114.71,68.82 114.74,68.83 122.58,60.99 129.46,60.99 131.15,59.3 141.32,59.3 141.41,59.24 141.39,59.13 141.13,58.44 141.37,57.74 141.38,57.63 141.29,57.57 124.61,57.57 112.78,69.41 112.79,69.44 112.85,70.01 112.63,70.53 112.62,70.64 112.71,70.7
GND on BOTTOM (solid shape): outline of 995 points within 121.25,27.06 146.18,56.88
GND on BOTTOM (solid shape): outline of 1013 points within 0,0 160,100
GND on BOTTOM (solid shape): outline of 1737 points within 28.31,62.85 138.64,93.07
GND on BOTTOM (solid shape): outline of 2048 points within 11.1,30.89 111.72,84.68
GND on BOTTOM (solid shape): outline of 4580 points within 18.29,5.71 141.42,63.17
(no net) on BOTTOM: 0,0 0,100 160,100 160,0 ; 115 cut-outs

## Text on the board
PLACE_BOUND_TOP: FIGURE | SIZE | 3.175 | DRILL CHART: TOP to BOTTOM | ALL UNITS ARE IN MILLIMETERS | PLATED | NON-PLATED | QTY | 4
